# Altium PCB midi_in.PcbDoc
Units mil, origin at the board's own origin, x right, y up, seen from the top; angles counter-clockwise.
Board outline 974.22 x 974.22 mil, 2 copper layers (Top Layer, Bottom Layer); 20 components, 6 nets, 76 pads, 0 vias.
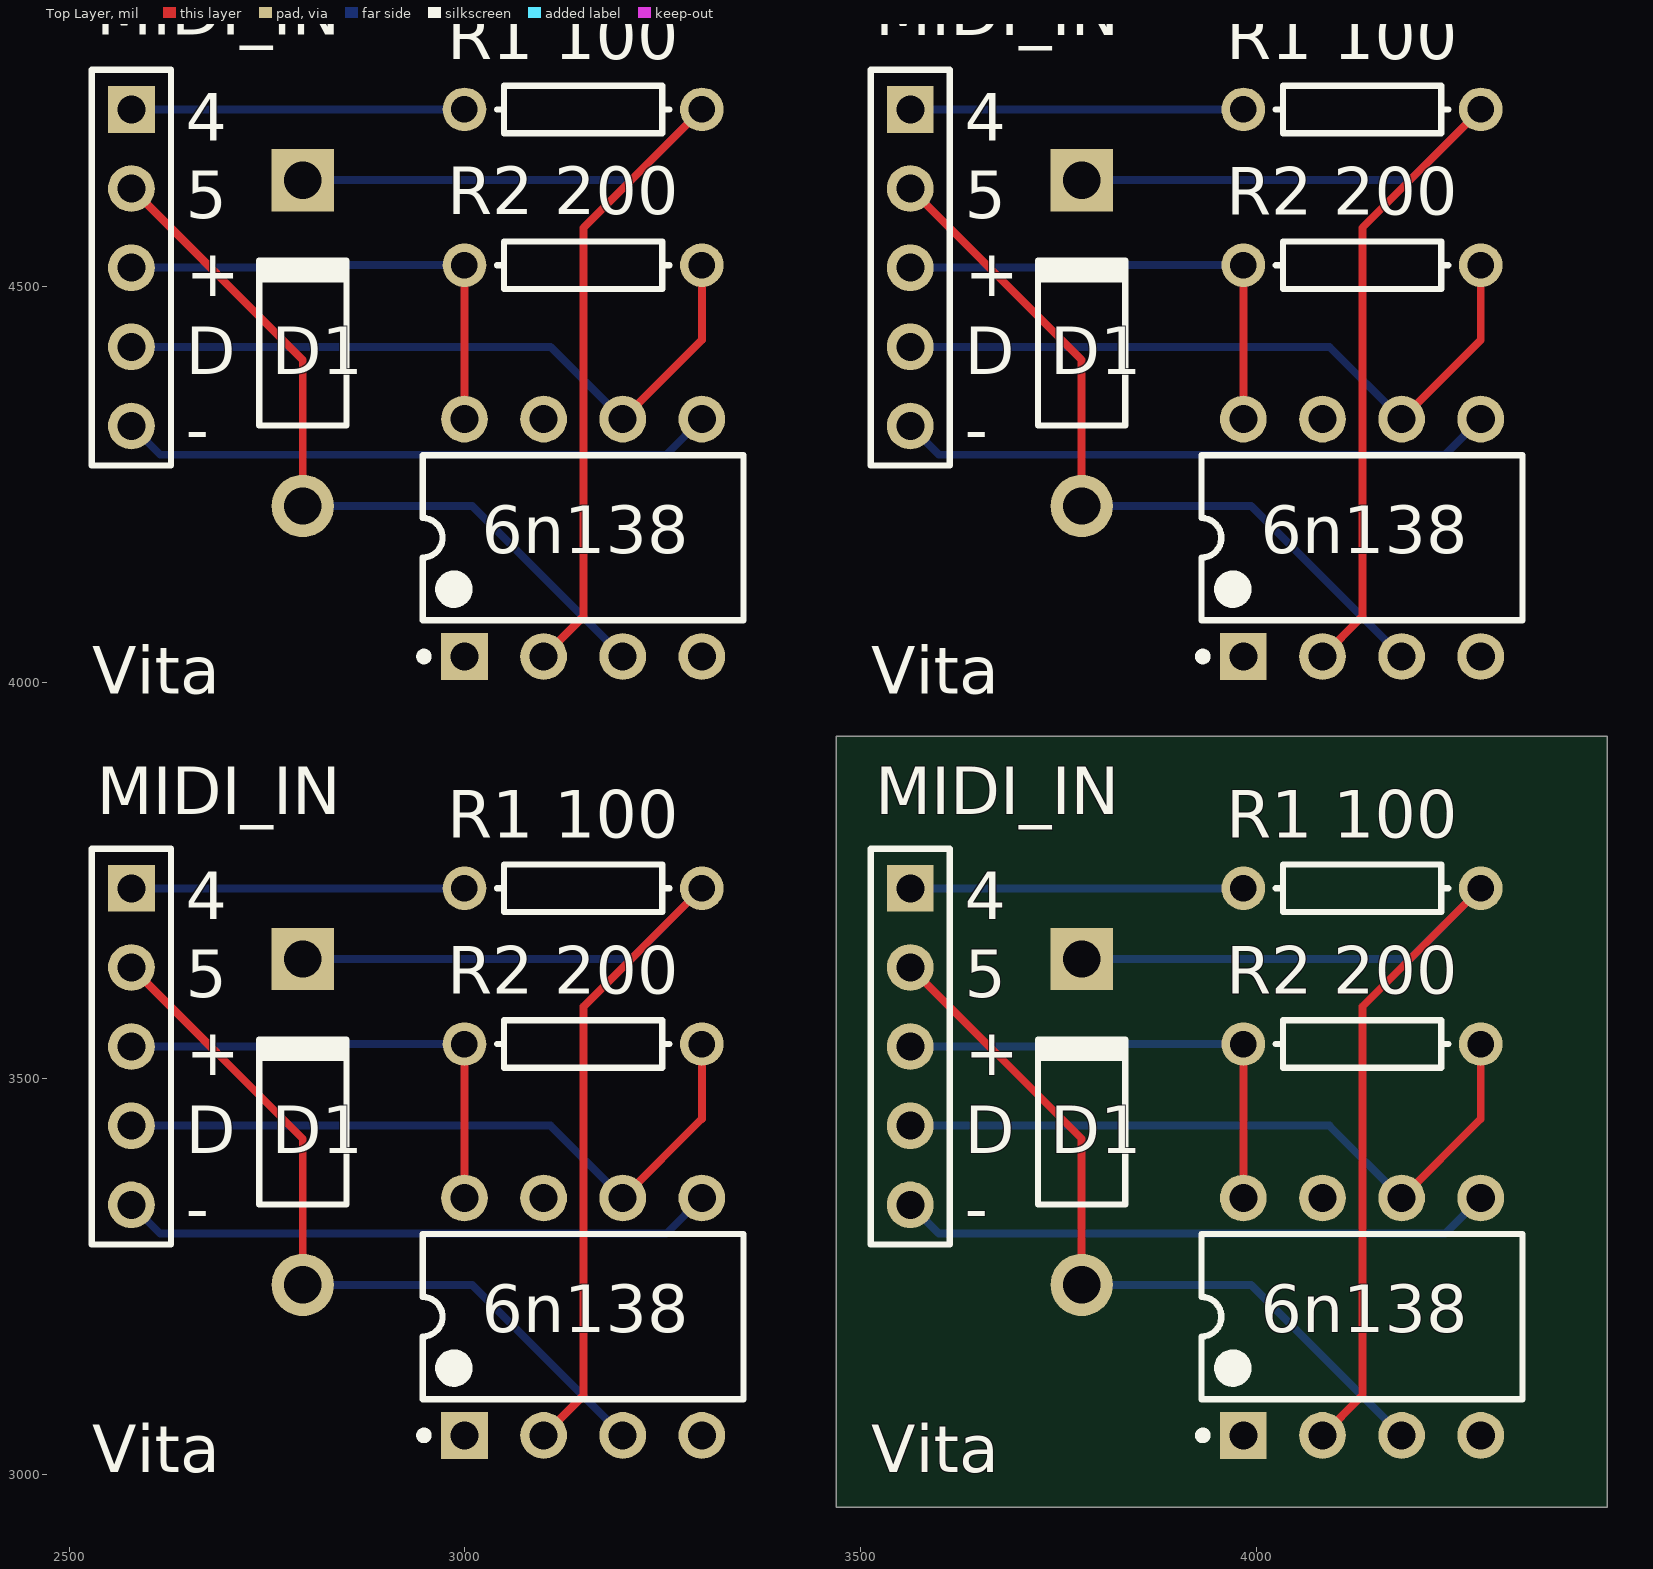
[diagram p0: Top Layer view]
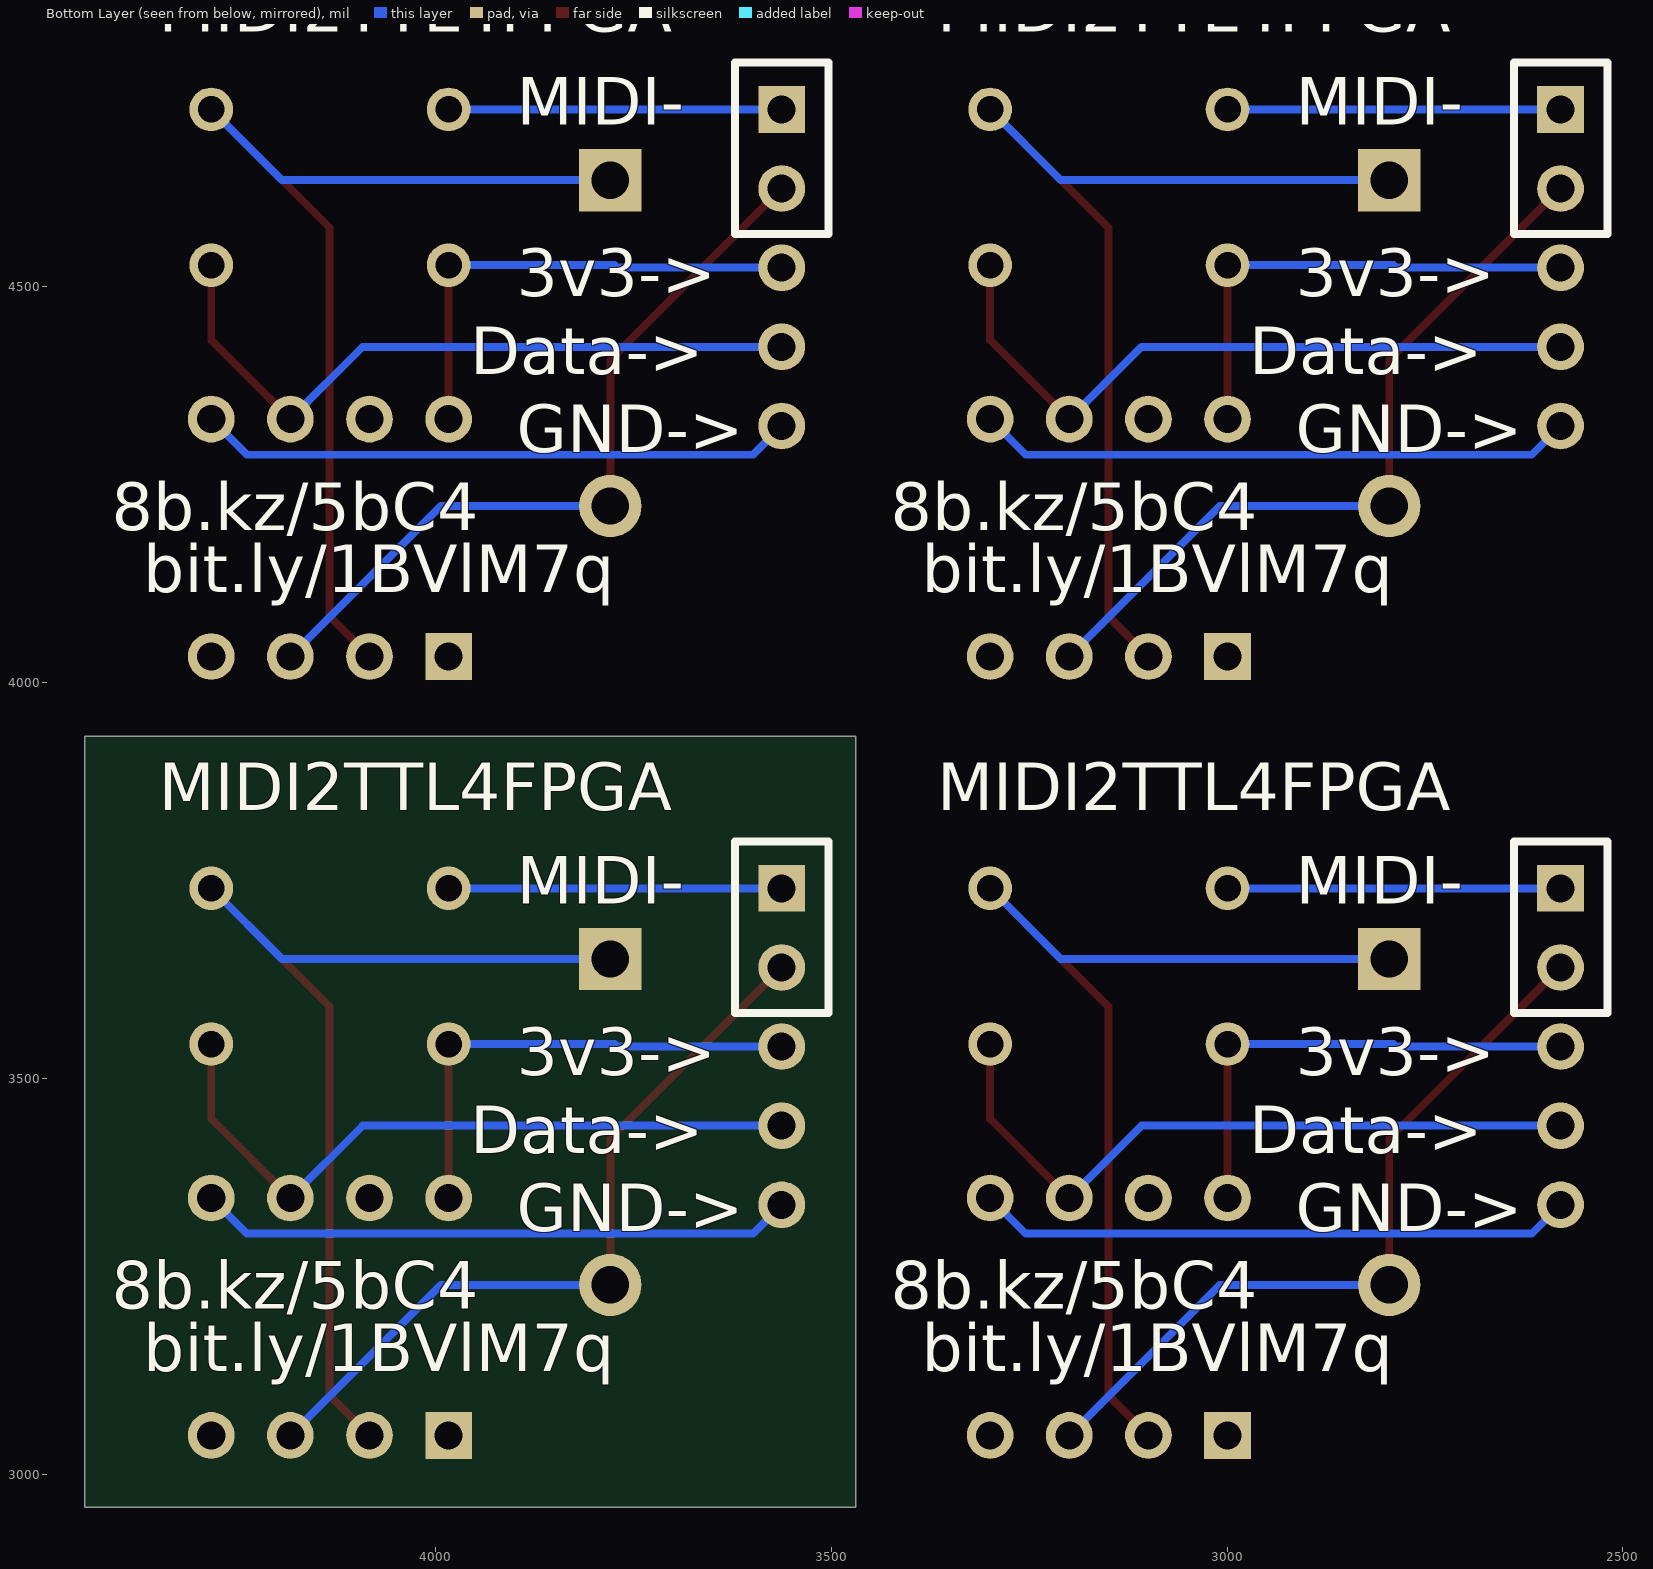
[diagram p1: Bottom Layer view, seen from below]

## Layer stack, top to bottom
Top Solder: solder mask 0.4, Solder Resist, Dk 3.5
Top Layer: signal copper 1.4
Dielectric 1: dielectric 12.6, FR-4, Dk 4.8
Bottom Layer: signal copper 1.4
Bottom Solder: solder mask 0.4, Solder Resist, Dk 3.5

## Board outline
3469.58,2957.77 3469.58,3931.99 4443.8,3931.99 4443.8,2957.77

## Design rules (kind name [scope] priority, off if disabled: settings)
Clearance [All] p1: gap=10
PolygonConnect [All] p1: connectstyle=Relief reliefconductorwidth=10 reliefentries=4 polygonreliefangle="90 Angle" airgapwidth=10
RoutingVias [All] p1: holewidth=28 width=50 viastyle="Through Hole" minholewidth=28 minwidth=50 maxholewidth=28 maxwidth=50
SolderMaskExpansion [All] p1: expansion=4
Width [All] p1: maxlimit=10 minlimit=10 preferedwidth=10
29 further rules are at their usual default settings.

## Classes and differential pairs
component class MIDI_ID: D1

## Components (designator, comment, footprint, x,y, rotation, side; value= is the part's Value field where it differs from the comment)
6n138 "6n138" DIP-8 3149.61,4183.07 r90 top
6n138 "6n138" DIP-8 4133.86,4183.07 r90 top
6n138 "6n138" DIP-8 3149.61,3198.82 r90 top
6n138 "6n138" DIP-8 4133.86,3198.82 r90 top
D1 "Diode 1N4001" DO-41 2795.28,4429.13 r90 top
D1 "Diode 1N4001" DO-41 3779.53,4429.13 r90 top
D1 "Diode 1N4001" DO-41 2795.28,3444.88 r90 top
D1 "Diode 1N4001" DO-41 3779.53,3444.88 r90 top
MIDI_IN "Header 5" HDR1X5 2578.74,4724.41 r270 top
MIDI_IN "Header 5" HDR1X5 3562.99,4724.41 r270 top
MIDI_IN "Header 5" HDR1X5 2578.74,3740.16 r270 top
MIDI_IN "Header 5" HDR1X5 3562.99,3740.16 r270 top
"R1 100" "Res1" AXIAL-0.3 3149.61,4724.41 r0 top (schematic designator R1)
"R1 100" "Res1" AXIAL-0.3 4133.86,4724.41 r0 top (schematic designator R1)
"R1 100" "Res1" AXIAL-0.3 3149.61,3740.16 r0 top (schematic designator R1)
"R1 100" "Res1" AXIAL-0.3 4133.86,3740.16 r0 top (schematic designator R1)
"R2 200" "Res1" AXIAL-0.3 3149.61,4527.56 r0 top (schematic designator R2)
"R2 200" "Res1" AXIAL-0.3 4133.86,4527.56 r0 top (schematic designator R2)
"R2 200" "Res1" AXIAL-0.3 3149.61,3543.31 r0 top (schematic designator R2)
"R2 200" "Res1" AXIAL-0.3 4133.86,3543.31 r0 top (schematic designator R2)

## Footprints (in the part's own frame and the unit in brackets; to place one, negate y for a bottom-side part, rotate by r counter-clockwise, add the part's x,y. Pads: shape width x height; smd on the part's side, far side on the other; paste and mask are expansions set on the pad)
AXIAL-0.3 [mm] "Axial Device, Thru-Hole; 2 Leads; 0.3 in Pin Spacing"
  round 1.4 hole 0.85: 1(-3.81,0) 2(3.81,0)
  silkscreen extent -2.77,-0.76 2.77,0.76
DIP-8 [mm] "DIP; 8 Leads; Row Spacing 7.62 mm; Pitch 2.54 mm"
  rect 1.5x1.5 hole 0.9: 1(-3.81,3.81)
  round 1.5 hole 0.9: 2(-3.81,1.27) 3(-3.81,-1.27) 4(-3.81,-3.81) 5(3.81,-3.81) 6(3.81,-1.27) 7(3.81,1.27) 8(3.81,3.81)
  silkscreen extent -3.93,-5.15 2.65,5.23, body extent -3.6,-5.15 3.6,5.15, height 5.08
DO-41 [mm] "Diode, Axial; Body 5.2 x 2.7 mm (LxDia. max), Lead Dia. 0.86 mm (max)"
  round 2 hole 1.2: 1(-5.23,0)
  rect 2x2 hole 1.2: 2(5.23,0)
  silkscreen extent -2.65,-1.4 2.75,1.4
HDR1X5 [mm] "Connector; Header; 5 Position"
  rect 1.5x1.5 hole 0.9: 1(0,0)
  round 1.5 hole 0.9: 2(2.54,0) 3(5.08,0) 4(7.62,0) 5(10.16,0)
  silkscreen extent -1.27,-1.27 11.43,1.27

## Part data
6n138 6n138 6n138 6n138: library part SW-DIP4
D1 D1 D1 D1: "1 Amp General Purpose Rectifier"
MIDI_IN MIDI_IN MIDI_IN MIDI_IN: "Header, 5-Pin"
"R1 100" "R1 100" "R1 100" "R1 100" "R2 200" "R2 200" "R2 200" "R2 200": "Resistor"

## Nets (pads, with @x,y where several pads share a name; then routed paths per layer and width w, separated by ;. In a path a pad name is that pad's centre, name@x,y a point inside that pad or via, vN(x,y) a via of type N, cw(c..) or ccw(c..) an arc to the next point about the centre after c; other vN are vias at no path point)
DATA: 6n138.6@3199.61,4333.07 "R2 200.2"@3299.61,4527.56 MIDI_IN.4@2578.74,4424.41 | length 894.6
  Top Layer w10: 6n138.6@3199.61,4333.07 3299.61,4433.07 3299.61,4527.56
  Bottom Layer w10: MIDI_IN.4@2578.74,4424.41 3108.27,4424.41 6n138.6@3199.61,4333.07
GND: 6n138.5@3299.61,4333.07 MIDI_IN.5@2578.74,4324.41 | length 754.6
  Bottom Layer w10: MIDI_IN.5@2578.74,4324.41 2615.15,4288 3254.54,4288 6n138.5@3299.61,4333.07
MIDI_PIN4: "R1 100.1"@2999.61,4724.41 MIDI_IN.1@2578.74,4724.41 | length 420.9
  Bottom Layer w10: MIDI_IN.1@2578.74,4724.41 2789,4724.41 2999.61,4724.41
MIDI_PIN5: 6n138.3@3199.61,4033.07 D1.1@2795.28,4223.23 MIDI_IN.2@2578.74,4624.41 | length 974
  Top Layer w10: MIDI_IN.2@2578.74,4624.41 2795.28,4407.87 D1.1@2795.28,4223.23
  Bottom Layer w10: D1.1@2795.28,4223.23 3009.45,4223.23 6n138.3@3199.61,4033.07
Net6n138_2: 6n138.2@3099.61,4033.07 "R1 100.2"@3299.61,4724.41 D1.2@2795.28,4635.04 | length 1315.5
  Top Layer w10: 6n138.2@3099.61,4033.07 3150,4083.46 3150,4574.8 3299.61,4724.41
  Bottom Layer w10: D1.2@2795.28,4635.04 3210.24,4635.04 3299.61,4724.41
VCC: 6n138.8@2999.61,4333.07 "R2 200.1"@2999.61,4527.56 MIDI_IN.3@2578.74,4524.41 | length 616.7
  Top Layer w10: 6n138.8@2999.61,4333.07 2999.61,4527.56
  Bottom Layer w10: MIDI_IN.3@2578.74,4524.41 2787,4524.41 2790.15,4527.56 2999.61,4527.56
pads on no net: 6n138.1 6n138.2@3099.61,3048.82 6n138.2@4083.86,3048.82 6n138.2@4083.86,4033.07 6n138.3@3199.61,3048.82 6n138.3@4183.86,3048.82 6n138.3@4183.86,4033.07 6n138.4 6n138.5@3299.61,3348.82 6n138.5@4283.86,3348.82 6n138.5@4283.86,4333.07 6n138.6@3199.61,3348.82 6n138.6@4183.86,3348.82 6n138.6@4183.86,4333.07 6n138.7 6n138.8@2999.61,3348.82 6n138.8@3983.86,3348.82 6n138.8@3983.86,4333.07 "R1 100.1"@2999.61,3740.16 "R1 100.1"@3983.86,3740.16 "R1 100.1"@3983.86,4724.41 "R1 100.2"@3299.61,3740.16 "R1 100.2"@4283.86,3740.16 "R1 100.2"@4283.86,4724.41 "R2 200.1"@2999.61,3543.31 "R2 200.1"@3983.86,3543.31 "R2 200.1"@3983.86,4527.56 "R2 200.2"@3299.61,3543.31 "R2 200.2"@4283.86,3543.31 "R2 200.2"@4283.86,4527.56 D1.1@2795.28,3238.98 D1.1@3779.53,3238.98 D1.1@3779.53,4223.23 D1.2@2795.28,3650.79 D1.2@3779.53,3650.79 D1.2@3779.53,4635.04 MIDI_IN.1@2578.74,3740.16 MIDI_IN.1@3562.99,3740.16 MIDI_IN.1@3562.99,4724.41 MIDI_IN.2@2578.74,3640.16 MIDI_IN.2@3562.99,3640.16 MIDI_IN.2@3562.99,4624.41 MIDI_IN.3@2578.74,3540.16 MIDI_IN.3@3562.99,3540.16 MIDI_IN.3@3562.99,4524.41 MIDI_IN.4@2578.74,3440.16 MIDI_IN.4@3562.99,3440.16 MIDI_IN.4@3562.99,4424.41 MIDI_IN.5@2578.74,3340.16 MIDI_IN.5@3562.99,3340.16 MIDI_IN.5@3562.99,4324.41
copper on no net: | length 14928.8
  Top Layer w10: 2578.74,3640.16 2795.28,3423.62 2795.28,3238.98 ; 2999.61,3348.82 2999.61,3543.31 ; 3099.61,3048.82 3150,3099.21 3150,3590.55 3299.61,3740.16 ; 3199.61,3348.82 3299.61,3448.82 3299.61,3543.31 ; 3562.99,3640.16 3779.53,3423.62 3779.53,3238.98 ; 3562.99,4624.41 3779.53,4407.87 3779.53,4223.23 ; 3983.86,3348.82 3983.86,3543.31 ; 3983.86,4333.07 3983.86,4527.56 ; 4083.86,3048.82 4134.25,3099.21 4134.25,3590.55 4283.86,3740.16 ; 4083.86,4033.07 4134.25,4083.46 4134.25,4574.8 4283.86,4724.41 ; 4183.86,3348.82 4283.86,3448.82 4283.86,3543.31 ; 4183.86,4333.07 4283.86,4433.07 4283.86,4527.56
  Bottom Layer w10: 2578.74,3340.16 2615.15,3303.75 3254.54,3303.75 3299.61,3348.82 ; 2578.74,3440.16 3108.27,3440.16 3199.61,3348.82 ; 2578.74,3540.16 2787,3540.16 2790.15,3543.31 2999.61,3543.31 ; 2578.74,3740.16 2789,3740.16 2999.61,3740.16 ; 2795.28,3238.98 3009.45,3238.98 3199.61,3048.82 ; 2795.28,3650.79 3210.24,3650.79 3299.61,3740.16 ; 3562.99,3340.16 3599.4,3303.75 4238.79,3303.75 4283.86,3348.82 ; 3562.99,3440.16 4092.52,3440.16 4183.86,3348.82 ; 3562.99,3540.16 3771.25,3540.16 3774.4,3543.31 3983.86,3543.31 ; 3562.99,3740.16 3773.25,3740.16 3983.86,3740.16 ; 3562.99,4324.41 3599.4,4288 4238.79,4288 4283.86,4333.07 ; 3562.99,4424.41 4092.52,4424.41 4183.86,4333.07 ; 3562.99,4524.41 3771.25,4524.41 3774.4,4527.56 3983.86,4527.56 ; 3562.99,4724.41 3773.25,4724.41 3983.86,4724.41 ; 3779.53,3238.98 3993.7,3238.98 4183.86,3048.82 ; 3779.53,3650.79 4194.49,3650.79 4283.86,3740.16 ; 3779.53,4223.23 3993.7,4223.23 4183.86,4033.07 ; 3779.53,4635.04 4194.49,4635.04 4283.86,4724.41

## Silkscreen, mask and mechanical layers (free items; w line width, h text height)
Top Overlay:
  text "4" at 2647.64,4685.04 h60
  text "4" at 3631.89,4685.04 h60
  text "5" at 2647.64,4586.61 h60
  text "5" at 3631.89,4586.61 h60
  text "+" at 2647.64,4488.19 h60
  text "+" at 3631.89,4488.19 h60
  text "D" at 2647.64,4389.76 h60
  text "D" at 3631.89,4389.76 h60
  text "-" at 2647.64,4291.34 h60
  text "-" at 3631.89,4291.34 h60
  text "Vita" at 2529.53,3986.22 h60
  text "Vita" at 3513.78,3986.22 h60
  text "4" at 2647.64,3700.79 h60
  text "4" at 3631.89,3700.79 h60
  text "5" at 2647.64,3602.36 h60
  text "5" at 3631.89,3602.36 h60
  text "+" at 2647.64,3503.94 h60
  text "+" at 3631.89,3503.94 h60
  text "D" at 2647.64,3405.51 h60
  text "D" at 3631.89,3405.51 h60
  text "-" at 2647.64,3307.09 h60
  text "-" at 3631.89,3307.09 h60
  text "Vita" at 2529.53,3001.97 h60
  text "Vita" at 3513.78,3001.97 h60
Bottom Overlay:
  lines w10: 2519.69,3582.68 2519.69,3799.21 2637.8,3799.21 2637.8,3582.68 2519.69,3582.68 ; 2519.69,4566.93 2637.8,4566.93 2637.8,4783.46 2519.69,4783.46 2519.69,4566.93 ; 3503.94,3582.68 3503.94,3799.21 3622.05,3799.21 3622.05,3582.68 3503.94,3582.68 ; 3503.94,4566.93 3503.94,4783.46 3622.05,4783.46 3622.05,4566.93 3503.94,4566.93
  text "MIDI2TTL4FPGA" at 3366.14,4822.83 h60
  text "MIDI2TTL4FPGA" at 4350.39,4822.83 h60
  text "MIDI-" at 2913.39,4704.72 h60
  text "MIDI-" at 3897.64,4704.72 h60
  text "3v3->" at 2913.39,4488.19 h60
  text "3v3->" at 3897.64,4488.19 h60
  text "Data->" at 2972.44,4389.76 h60
  text "Data->" at 3956.69,4389.76 h60
  text "GND->" at 2913.39,4291.34 h60
  text "GND->" at 3897.64,4291.34 h60
  text "8b.kz/5bC4" at 3425.2,4192.91 h60
  text "8b.kz/5bC4" at 4409.45,4192.91 h60
  text "bit.ly/1BVlM7q" at 3385.83,4114.17 h60
  text "bit.ly/1BVlM7q" at 4370.08,4114.17 h60
  text "MIDI2TTL4FPGA" at 3366.14,3838.58 h60
  text "MIDI2TTL4FPGA" at 4350.39,3838.58 h60
  text "MIDI-" at 2913.39,3720.47 h60
  text "MIDI-" at 3897.64,3720.47 h60
  text "3v3->" at 2913.39,3503.94 h60
  text "3v3->" at 3897.64,3503.94 h60
  text "Data->" at 2972.44,3405.51 h60
  text "Data->" at 3956.69,3405.51 h60
  text "GND->" at 2913.39,3307.09 h60
  text "GND->" at 3897.64,3307.09 h60
  text "8b.kz/5bC4" at 3425.2,3208.66 h60
  text "8b.kz/5bC4" at 4409.45,3208.66 h60
  text "bit.ly/1BVlM7q" at 3385.83,3129.92 h60
  text "bit.ly/1BVlM7q" at 4370.08,3129.92 h60
Top Solder:
  lines w10: 2480.32,2952.76 2480.32,3937.01 ; 2480.31,2952.76 2480.32,2952.76 ; 2480.31,2952.76 3464.57,2952.76 ; 2480.31,2952.76 2480.31,3937.01 ; 2480.32,2952.76 2480.32,3937.01 ; 2480.31,2952.76 2480.32,2952.76 ; 2480.31,2952.76 3464.57,2952.76 ; 2480.31,2952.76 2480.31,3937.01 ; 2480.31,2952.76 3464.57,2952.76 ; 2480.31,2952.76 3464.57,2952.76 ; 2480.32,2952.76 2480.32,3937.01 ; 2480.31,2952.76 2480.32,2952.76 ; 2480.31,2952.76 3464.57,2952.76 ; 2480.31,2952.76 2480.31,3937.01 ; 2480.31,2952.76 3464.57,2952.76 ; 2480.31,3937.01 3464.57,3937.01 ; 2480.31,3937.01 2480.31,4921.26 ; 2480.31,3937.01 3464.57,3937.01 ; 2480.31,3937.01 2480.32,3937.01 ; 2480.32,3937.01 2480.32,4921.26 ; 2480.31,3937.01 3464.57,3937.01 ; 2480.31,3937.01 3464.57,3937.01 ; 2480.31,4921.26 3464.57,4921.26 ; 3464.57,2952.76 3464.57,3937.01 ; 3464.57,2952.76 3464.57,2952.76 ; 3464.57,2952.76 4448.82,2952.76 ; 3464.57,2952.76 3464.57,3937.01 ; 3464.57,2952.76 3464.57,3937.01 ; 3464.57,2952.76 3464.57,3937.01 ; 3464.57,2952.76 3464.57,3937.01 ; 3464.57,2952.76 3464.57,2952.76 ; 3464.57,2952.76 3464.57,3937.01 ; 3464.57,2952.76 3464.57,2952.76 ; 3464.57,2952.76 3464.57,2952.76 ; 3464.57,2952.76 3464.57,3937.01 ; 3464.57,2952.76 3464.57,2952.76 ; 3464.57,2952.76 4448.82,2952.76 ; 3464.57,2952.76 3464.57,3937.01 ; 3464.57,2952.76 4448.82,2952.76 ; 3464.57,2952.76 3464.57,2952.76 ; 3464.57,2952.76 3464.57,2952.76 ; 3464.57,2952.76 3464.57,3937.01 ; 3464.57,2952.76 3464.57,2952.76 ; 3464.57,2952.76 3464.57,3937.01 ; 3464.57,2952.76 3464.57,3937.01 ; 3464.57,2952.76 3464.57,3937.01 ; 3464.57,2952.76 3464.57,2952.76 ; 3464.57,2952.76 3464.57,3937.01 ; 3464.57,2952.76 3464.57,2952.76 ; 3464.57,2952.76 3464.57,2952.76 ; 3464.57,2952.76 4448.82,2952.76 ; 3464.57,2952.76 3464.57,3937.01 ; 3464.57,2952.76 3464.57,2952.76 ; 3464.57,2952.76 4448.82,2952.76 ; 3464.57,2952.76 3464.57,3937.01 ; 3464.57,2952.76 4448.82,2952.76 ; 3464.57,3937.01 4448.82,3937.01 ; 3464.57,3937.01 3464.57,3937.01 ; 3464.57,3937.01 3464.57,3937.01 ; 3464.57,3937.01 3464.57,4921.26 ; 3464.57,3937.01 3464.57,3937.01 ; 3464.57,3937.01 4448.82,3937.01 ; 3464.57,3937.01 3464.57,4921.26 ; 3464.57,3937.01 3464.57,4921.26 ; 3464.57,3937.01 3464.57,4921.26 ; 3464.57,3937.01 3464.57,3937.01 ; 3464.57,3937.01 4448.82,3937.01 ; 3464.57,3937.01 3464.57,4921.26 ; 3464.57,3937.01 4448.82,3937.01 ; 3464.57,3937.01 3464.57,3937.01 ; 3464.57,3937.01 3464.57,3937.01 ; 3464.57,3937.01 4448.82,3937.01 ; 3464.57,3937.01 4448.82,3937.01 ; 3464.57,3937.01 3464.57,4921.26 ; 3464.57,3937.01 3464.57,3937.01 ; 3464.57,3937.01 4448.82,3937.01 ; 3464.57,3937.01 3464.57,4921.26 ; 3464.57,3937.01 4448.82,3937.01 ; 3464.57,3937.01 3464.57,3937.01 ; 3464.57,3937.01 3464.57,3937.01 ; 3464.57,3937.01 4448.82,3937.01 ; 3464.57,4921.26 4448.82,4921.26 ; 3464.57,4921.26 3464.57,4921.26 ; 3464.57,4921.26 3464.57,4921.26 ; 3464.57,4921.26 4448.82,4921.26 ; 3464.57,4921.26 4448.82,4921.26 ; 4448.82,2952.76 4448.82,2952.76 ; 4448.82,2952.76 4448.82,2952.76 ; 4448.82,2952.76 4448.82,3937.01 ; 4448.82,2952.76 4448.82,2952.76 ; 4448.82,2952.76 4448.82,3937.01 ; 4448.82,2952.76 4448.82,3937.01 ; 4448.82,2952.76 4448.82,3937.01 ; 4448.82,2952.76 4448.82,2952.76 ; 4448.82,2952.76 4448.82,3937.01 ; 4448.82,2952.76 4448.82,2952.76 ; 4448.82,2952.76 4448.82,2952.76 ; 4448.82,3937.01 4448.82,4921.26 ; 4448.82,3937.01 4448.82,4921.26 ; 4448.82,3937.01 4448.82,4921.26 ; 4448.82,3937.01 4448.82,4921.26 ; 4448.82,3937.01 4448.82,3937.01 ; 4448.82,3937.01 4448.82,3937.01 ; 4448.82,3937.01 4448.82,4921.26 ; 4448.82,3937.01 4448.82,3937.01 ; 4448.82,3937.01 4448.82,4921.26 ; 4448.82,3937.01 4448.82,4921.26 ; 4448.82,3937.01 4448.82,4921.26 ; 4448.82,3937.01 4448.82,3937.01 ; 4448.82,3937.01 4448.82,4921.26 ; 4448.82,3937.01 4448.82,3937.01 ; 4448.82,3937.01 4448.82,3937.01 ; 4448.82,3937.01 4448.82,3937.01 ; 4448.82,3937.01 4448.82,3937.01 ; 4448.82,4921.26 4448.82,4921.26 ; 4448.82,4921.26 4448.82,4921.26 ; 4448.82,4921.26 4448.82,4921.26 ; 4448.82,4921.26 4448.82,4921.26 ; 4448.82,4921.26 4448.82,4921.26 ; 4448.82,4921.26 4448.82,4921.26
Bottom Solder:
  lines w10: 2480.32,3937.01 4448.82,3937.01 ; 3464.57,2952.76 3464.57,4330.71 ; 3464.57,2952.76 3464.57,2952.76 ; 3464.57,3346.46 3464.57,3937.01 ; 3464.57,3346.46 3464.57,3937.01 ; 3464.57,3346.46 3464.57,3346.46 ; 3464.57,3937.01 3464.57,3937.01 ; 3464.57,3937.01 3464.57,3937.01 ; 3464.57,4330.71 3464.57,4330.71 ; 3464.57,4330.71 3464.57,4921.26 ; 3464.57,4921.26 3464.57,4921.26 ; 4448.82,2952.76 2480.32,2952.76 2480.32,4921.26 4448.82,4921.26 ; 4448.82,2952.76 4448.82,4921.26 ; 4448.82,2952.76 4448.82,2952.76 ; 4448.82,3346.46 4448.82,3937.01 ; 4448.82,3346.46 4448.82,3346.46 ; 4448.82,3937.01 4448.82,3937.01 ; 4448.82,3937.01 4448.82,3937.01 ; 4448.82,4330.71 4448.82,4921.26 ; 4448.82,4330.71 4448.82,4921.26 ; 4448.82,4330.71 4448.82,4330.71 ; 4448.82,4921.26 4448.82,4921.26 ; 4448.82,4921.26 4448.82,4921.26